# EAGLE board reg_ldo (EAGLE 5.06)
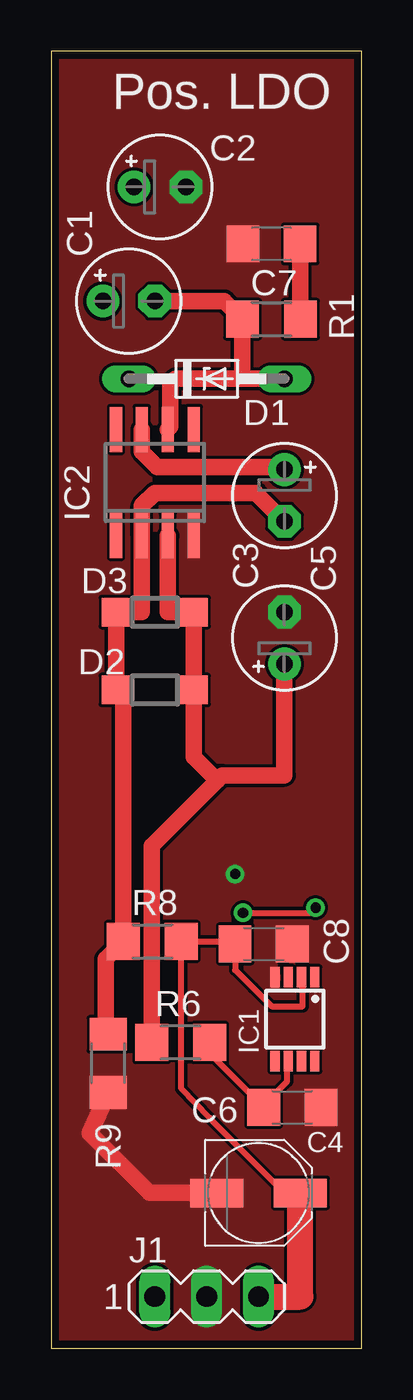
[diagram p0: board, top side]
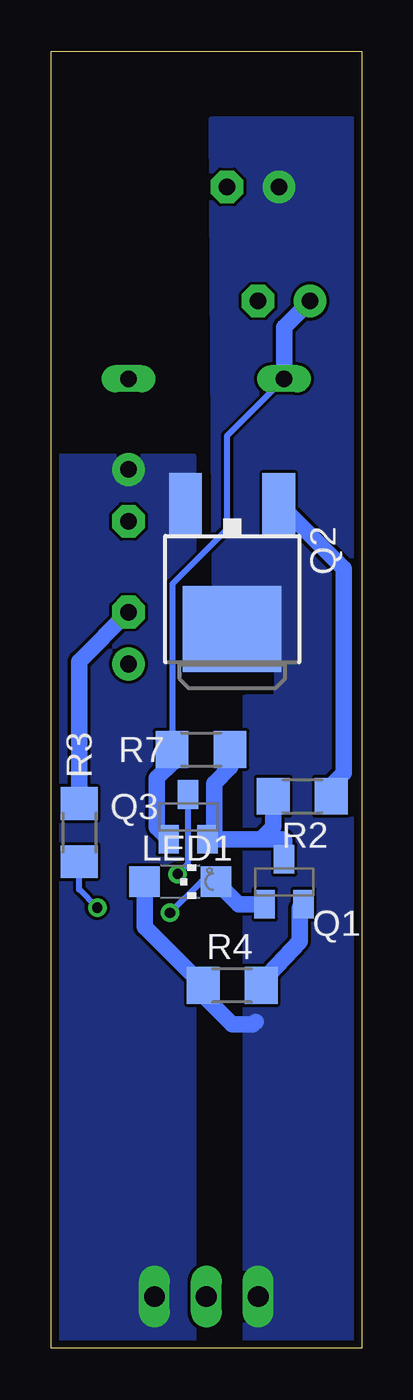
[diagram p1: board, bottom side, seen from below]

Size 15.22 x 63.55 mm. Coordinates in mm from the lower left corner, seen from the top.
Outline: 0,0 15.22,0 15.22,63.55 0,63.55 0,0
Copper layers (1*16): Top 0.035mm / dielectric 1.5mm / Bottom 0.035mm
Design rules "6mils *": minimum track width 8mil, minimum drill 15mil, track to track 6mil, track to pad 6mil, pad to pad 6mil, via to via 6mil, smd to smd 6mil, copper to edge 15mil, drill to drill 8mil, minimum pad ring 10mil, minimum via ring 8mil, stop-mask expansion 4mil, vias tented up to drill 0mil, thermal gap 0mil

## Footprints (pad centres in the part's own frame; a part is rotated, then mirrored left to right if it is on the bottom)
E2,5-5 = drill 0.813 pad 1.6 round: + -1.27,0 | drill 0.813 pad 1.6 octagon: - 1.27,0
PANASONIC_C = smd 2.6 x 1.4: + 2.05,0; - -2.05,0
C1206 = smd 1.6 x 1.8: 1 -1.4,0; 2 1.4,0
DO34Z7 = drill 0.813 long: A 3.81,0; C -3.81,0
SOD123 = smd 1.4 x 1.4: A 1.9,0; C -1.9,0
MSOP8 = smd 0.45 x 1: 1 -0.975,-2.05; 2 -0.325,-2.05; 3 0.325,-2.05; 4 0.975,-2.05; 5 0.975,2.05; 6 0.325,2.05; 7 -0.325,2.05; 8 -0.975,2.05
SO8 = smd 0.6 x 2.2: 1 -1.905,-2.6; 2 -0.635,-2.6; 3 0.635,-2.6; 4 1.905,-2.6; 5 1.905,2.6; 6 0.635,2.6; 7 -0.635,2.6; 8 -1.905,2.6
MA03-1 = drill 1.016 long: 1 -2.54,0; 2 0,0; 3 2.54,0
CHIPLED_1206 = smd 1.5 x 1.5: A 0,-1.75; C 0,1.75
SOT23-BEC = smd 1 x 1.4: B -0.95,-1.1; C 0,1.1; E 0.95,-1.1
DPAK = smd 1.6 x 3: 1 -2.28,-4.04; 3 2.28,-4.04 | smd 4.826 x 4.191: 2 0,2.096
R1206 = smd 1.6 x 1.803: 1 -1.422,0; 2 1.422,0

## Placement (x,y rotation side)
C1  120u  [E2,5-5]  3.81,51.31 0 top
C2  120u  [E2,5-5]  5.33,56.9 0 top
C3  120u  [E2,5-5]  11.43,34.8 90 top
C4  100u  [PANASONIC_C]  10.16,7.62 0 top
C5  120u  [E2,5-5]  11.43,41.78 270 top
C6  0.1u  [C1206]  11.81,11.81 0 top
C7  470p  [C1206]  10.79,54.1 180 top
C8  0.1u  [C1206]  10.41,19.81 0 top
D1  1N5225B  [DO34Z7]  7.62,47.5 0 top
D2  1N4148_SMD  [SOD123]  5.08,32.26 0 top
D3  1N4148_SMD  [SOD123]  5.08,36.07 180 top
IC1  ADR441  [MSOP8]  11.94,16.13 180 top
IC2  AD8655  [SO8]  5.08,42.42 0 top
J1  Header  [MA03-1]  7.62,2.54 0 top
LED1  Green  [CHIPLED_1206]  8.89,22.86 270 bottom
Q1  BC856B  [SOT23-BEC]  3.81,22.86 0 bottom
Q2  D44H11MT  [DPAK]  6.35,37.34 180 bottom
Q3  BC856B  [SOT23-BEC]  8.51,26.04 0 bottom
R1  200  [R1206]  10.79,50.42 180 top
R2  10  [R1206]  2.92,27.05 180 bottom
R3  12k  [R1206]  13.84,25.27 90 bottom
R4  47.5  [R1206]  6.35,17.78 0 bottom
R6  499  [R1206]  6.35,14.99 0 top
R7  1k  [R1206]  7.87,29.34 180 bottom
R8  320  [R1206]  4.95,19.94 180 top
R9  1k  [R1206]  2.79,13.97 270 top

## Library data of the parts
C1-C8 R1-R4 R6-R9 = rcl
D1 = diode
D2 D3 = smps
IC1 Q2 = cdp
IC2 = analog-devices
J1 = con-lstb
LED1 = led
Q1 Q3 = transistor-pnp

## Nets
BASE: C1.+ D1.C Q3.B R7.2
GND: C2.- C3.- C4.- C6.2 C7.2 C8.2 IC1.4 IC2.4 J1.2 Q3.C R3.2 R9.2
IN: C2.+ J1.1 LED1.A Q2.2 R4.1
N$1: C7.1 R1.1
N$3: C3.+ D2.A D3.C IC2.3 R6.1
N$4: Q1.C Q3.E R2.2 R7.1
N$5: C5.- D2.C D3.A IC2.2 R8.2 R9.1
N$6: C6.1 IC1.6 R6.2
N$8: LED1.C Q1.B R3.1
N$9: Q1.E R4.2
N$10: Q2.1 R2.1
N$11: C1.- D1.A IC2.6 R1.2
OUT: C4.+ C5.+ C8.1 IC1.2 IC2.7 J1.3 Q2.3 R8.1

## Tracks (layer width: path | path; a pad name or v marks a point on that pad's centre or on a via)
BASE
  Bottom 0.305: R7.2 9.27,29.36 9.27,37.47 6.6,40.13 6.6,44.7 D1.C
  Bottom 0.813: D1.C 3.81,50.04 C1.+ | R7.2 9.3,28.68 10.03,27.94 10.03,25.51 Q3.B
GND  (via drill 0.5)
  Top 0.813: C4.- 4.83,7.62 1.91,10.54 R9.2
  Bottom 0.305: Q3.C 8.51,23.75 v9.02,23.24
  Bottom 0.813: R3.2 13.84,33.66 C3.-
  pour Top: 0.25,69.6 15.11,69.6 15.11,0.13 0.25,0.13
IN
  Bottom 0.813: LED1.A 10.64,20.65 R4.1 7.77,17.3 6.35,15.88 5.33,15.88 5.21,16
  pour Bottom: 0,60.2 7.37,60.2 7.24,37.08 4.06,37.08 4.19,31.88 5.71,31.88 5.71,0 0,0
N$1
  Top 0.813: C7.1 12.2,50.44 R1.1
N$3
  Top 0.813: IC2.3 5.71,36.07 D3.C D2.A 6.98,28.96 8.13,27.82 | R6.1 4.93,24.62 8.13,27.82 | C3.+ 11.43,28.07 8.38,28.07 8.13,27.82
N$4
  Bottom 0.813: Q1.C 3.81,24.89 3.85,24.93 4.95,24.93 | R7.1 6.45,28.47 7.24,27.69 7.24,25.25 Q3.E 4.95,24.93 | R2.2 4.34,25.55 4.95,24.93
N$5
  Top 0.305: 4.45,36.07 IC2.2 | R9.1 2.67,15.62
  Top 0.813: 4.45,36.07 D3.A D2.C 3.53,31.78 R8.2 2.67,19.07 2.67,15.62 | 4.45,36.2 IC2.2 4.45,41.27 5.08,41.91 10.03,41.91 C5.-
N$6
  Top 0.305: IC1.6 11.56,14.02 11.56,13.08 10.41,11.94 C6.1 7.77,14.45 R6.2
N$8  (via drill 0.5)
  Top 0.305: v9.4,21.34 12.7,21.34 v12.95,21.59
  Bottom 0.305: LED1.C 7.87,22.86 v9.4,21.34 | R3.1 13.84,22.48 v12.95,21.59
  Bottom 0.813: Q1.B 6.04,21.76 LED1.C
N$9
  Bottom 0.813: R4.2 4.93,17.93 3.05,19.94 3.05,21.57 Q1.E
N$10
  Bottom 0.813: R2.1 1.5,27.58 0.89,28.19 0.89,38.2 Q2.1
N$11
  Top 0.813: C1.- 8.48,51.31 R1.2 9.37,47.65 9.53,47.5 | 9.53,47.5 6.1,47.5 5.84,47.24 5.84,45.15 IC2.6 | 9.53,47.5 D1.A
OUT
  Top 0.305: IC1.2 12.2,18.25 12.23,18.25 12.32,18.16 12.32,16.76 10.79,16.76 9.91,17.65 9.02,18.54 C8.1 9.14,19.94 R8.1 6.38,12.72 7.75,11.3 11.43,7.62
  Top 0.813: C4.+ 11.43,7.62 11.43,7.64 | IC2.7 4.45,43.94 5.21,43.18 11.3,43.18 C5.+
  Top 1.27: J1.3 12.21,2.54 C4.+
  pour Bottom: 15.24,0 15.24,43.69 8.26,43.69 8.26,0

## Text on the board
tPlace: Pos. LDO